# Altium PCB TOP.PcbDoc
Units mil, origin at the board's own origin, x right, y up, seen from the top; angles counter-clockwise.
Board outline 800 x 500 mil, 2 copper layers (Top Layer, Bottom Layer); 6 components, 8 nets, 25 pads, 7 vias.
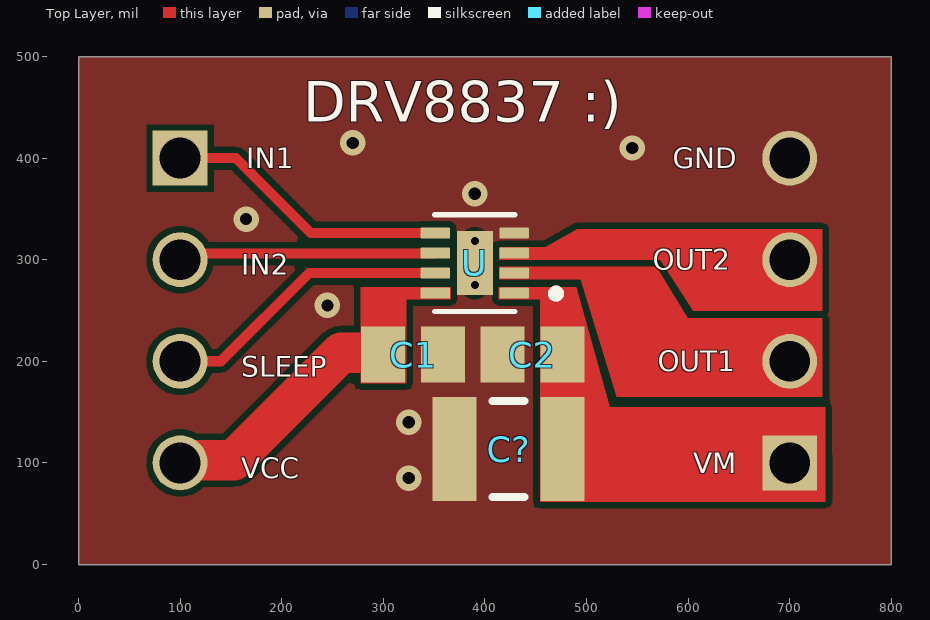
[diagram p0: Top Layer view]
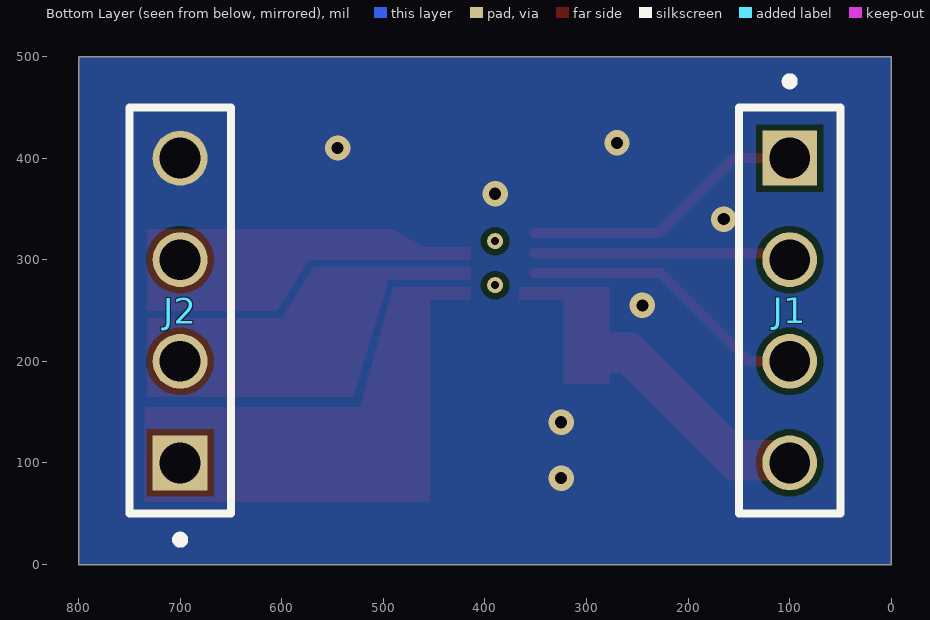
[diagram p1: Bottom Layer view, seen from below]
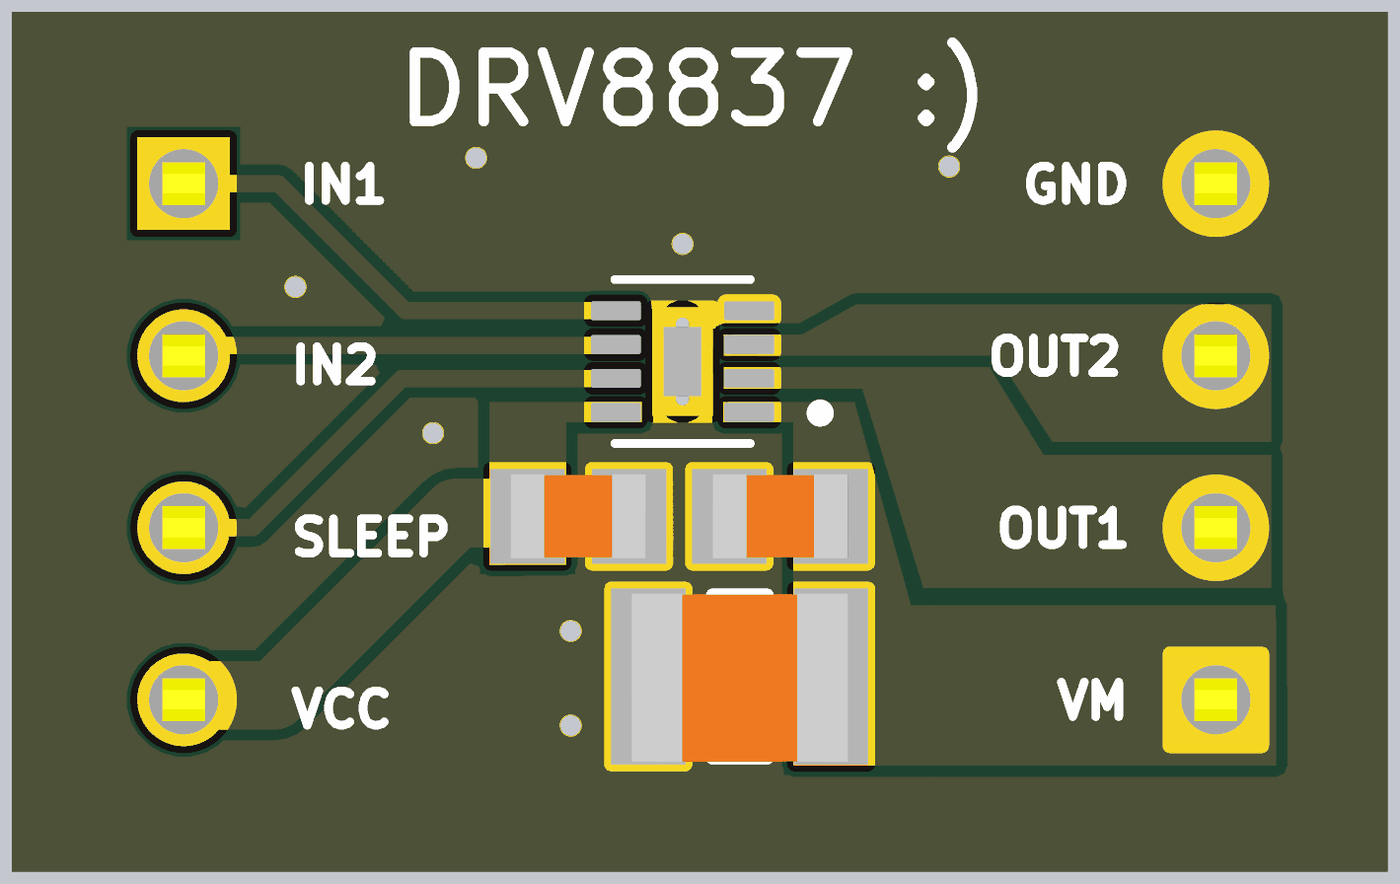
[diagram p2: 3D render of the assembled board from above, using the file's embedded part models]

## Layer stack, top to bottom
Top Solder: solder mask 0.4, Solder Resist, Dk 3.5
Top Layer: signal copper 1.4
Dielectric 1: dielectric 12.6, FR-4, Dk 4.8
Bottom Layer: signal copper 1.4
Bottom Solder: solder mask 0.4, Solder Resist, Dk 3.5

## Board outline
0,0 800,0 800,500 0,500

## Design rules (kind name [scope] priority, off if disabled: settings)
Clearance [All] p1: gap=6 ignorepadtopadclearanceinfootprint=FALSE except(0: Arc-Hole Track-Hole SMDPad-Hole THPad-Hole Via-Hole Fill-Hole Poly-Hole Region-Hole Text-Hole; 5: Arc-SMDPad Arc-THPad Track-SMDPad Track-THPad SMDPad-SMDPad SMDPad-THPad THPad-THPad; 10: Arc-Text Track-Text SMDPad-Text THPad-Text Via-Text Fill-Text Poly-Text Region-Text Text-Text)
PlaneConnect [All] p1: planeconnectstyle=Direct reliefexpansion=20 reliefentries=4 reliefconductorwidth=10 reliefairgap=10
PolygonConnect [All] p1: connectstyle=Direct reliefconductorwidth=10 reliefentries=4 polygonreliefangle="90 Angle" airgapwidth=10
RoutingVias [All] p1: holewidth=28 width=50 viastyle="Through Hole" minholewidth=28 minwidth=50 maxholewidth=28 maxwidth=50
SolderMaskExpansion [All] p1: expansion=4 istentingtop=FALSE
Width [All] p1: maxlimit=100 minlimit=10 preferedwidth=10 bottomlayer_maxwidth=10 minimp=50.000000 maximp=50.000000 favimp=50.000000
29 further rules are at their usual default settings.

## Components (designator, comment, footprint, x,y, rotation, side; value= is the part's Value field where it differs from the comment)
C1 "C0805C104J5RACTU" CAPC0805L 329.34,206.66 r180 top locked
C2 "C0805C104J5RACTU" CAPC0805L 446.7,206.66 r0 top locked
C? "" CAPC1210L 423.25,113.54 r180 top
J1 "TSW-104-07-L-S" TSW-104-07-L-S 100,250 r270 bottom
J2 "TSW-104-07-L-S" TSW-104-07-L-S 700,250 r90 bottom locked
U "DRV8837DSGR" SON50P200X200X80-9N 390,296.65 r180 top locked

## Footprints (in the part's own frame and the unit in brackets; to place one, negate y for a bottom-side part, rotate by r counter-clockwise, add the part's x,y. Pads: shape width x height; smd on the part's side, far side on the other; paste and mask are expansions set on the pad)
CAPC0805L [mm]
  rect 1.1x1.4 smd: 1(-0.75,0) 2(0.75,0)
  body extent -1,-0.63 1,0.63, height 0.6
CAPC1210L [mm]
  rect 1.1x2.6 smd: 1(-1.35,0) 2(1.35,0)
  silkscreen extent -0.4,-1.2 0.4,1.2, body extent -1.6,-1.23 1.6,1.27, height 0.95
SON50P200X200X80-9N [mm]
  rrect25% 0.74x0.28 smd: 1(-0.985,0.75) 2(-0.985,0.25) 3(-0.985,-0.25) 4(-0.985,-0.75) 5(0.985,-0.75) 6(0.985,-0.25) 7(0.985,0.25) 8(0.985,0.75)
  rect 0.9x1.6 smd paste-2: 9(0,0)
  round 0.4 hole 0.2 mask+0: 9_1(0,0.55) 9_2(0,-0.55)
  silkscreen extent -2.13,-1.21 1,1.21
TSW-104-07-L-S [mm] "Samtec Inc. TSW-104-07-L-S"
  rect 1.37x1.37 hole 1.02: 1(-3.81,0)
  round 1.37 hole 1.02: 2(-1.27,0) 3(1.27,0) 4(3.81,0)
  silkscreen extent -5.83,-1.27 5.08,1.27, body extent -5.21,-1.27 5.08,1.27, height 8.38

## Part data
C1 C2: library part CMPL-001-A884-A.2, "0.1µF ±5% 50V Ceramic Capacitor X7R 0805 (2012 Metric)", Capacitance=0.1µF, Manufacturer=KEMET, Operating Temperature="-55°C ~ 125°C", Package=0805, Supplier 1 Part Number=399-1171-1-ND, Temperature Coefficient=X7R, Tolerance=±5%, Voltage Rating=50V, Applications="Bypass, Decoupling", Manufacturer Part Number=C0805C104J5RACTU, Supplier 1=Digikey
C?: library part CMPL-001-A044-A.4, "10µF 50V Ceramic Capacitor X7R 1210 (3225 Metric) 0.126\" L x 0.098\" W (3.20mm x 2.50mm)", Capacitance=10µF, Manufacturer="Murata Electronics North America", Manufacturer Part Number=GRM32ER71H106KA12L, Operating Temperature="-55°C ~ 125°C", Package=1210, Supplier 1 Part Number=490-6544-1-ND, Temperature Coefficient=X7R, Tolerance=±10%, Voltage Rating=50V, Applications="General Purpose", FUTEK Item #=GOD05133, Supplier 1=Digikey
J1 J2: library part CMPL-001-B545-A.2, "CONN HEADER VERT 4POS 2.54MM", Color=Black, Manufacturer="Samtec Inc.", Supplier 1 Part Number=SAM1031-04-ND, Connector Type="Male Pin", Contact Finish=Gold, Contact Finish Thickness="10.0µin (0.25µm)", Contact Type="Male Pin", Manufacturer Part Number=TSW-104-07-L-S, Mounting Type="Through Hole", Number of Positions=4, Number of Positions Loaded=All, Number of Rows=1, Pitch="0.100\" (2.54mm)", RoHS Compliance=Yes, Row Spacing=-, Supplier 1=Digikey, Termination=Solder
U: library part CMP-002-000000-2, "11-V, 1.8-A H-bridge motor driver 8-WSON -40 to 85", Package="WSON-8 Texas Instruments", Arrow_Electronics-Purchase-URL=https://snapeda.com/shop?store=Arrow+Electronics&id=230051, BuyPart=https://www.snapeda.com/parts/DRV8837DSGR/Texas%20Instruments/view-part/230051/?ref=eda, Component Type=Standard, Design Item ID=DRV8837DSGR, Digi-Key_Part_Number=296-34806-1-ND, DigiKey-Purchase-URL=https://snapeda.com/shop?store=DigiKey&id=230051, MF="Texas Instruments", Mouser-Purchase-URL=https://snapeda.com/shop?store=Mouser&id=230051, MP=DRV8837DSGR, Pin Count=9, SnapEDA_Link=https://www.snapeda.com/parts/DRV8837DSGR/Texas%20Instruments/view-part/230051/?ref=snap, Source=DRV8837DSGR.SchLib, Texas_Instruments-Purchase-URL=https://snapeda.com/shop?store=Texas+Instruments&id=230051

## Via types
v1: diameter 25, hole 12, Top Layer to Bottom Layer, tented both sides, 7 vias

## Nets (pads, with @x,y where several pads share a name; then routed paths per layer and width w, separated by ;. In a path a pad name is that pad's centre, name@x,y a point inside that pad or via, vN(x,y) a via of type N, cw(c..) or ccw(c..) an arc to the next point about the centre after c; other vN are vias at no path point)
GND: C1.1 C2.1 C?.2 J2.4 U.4 U.9
  other v1: 325,85 325,140 245,255 165,340 390,365 545,410 270,415
IN1: J1.1 U.5 | length 281.8
  Top Layer w10: J1.1 155,400 228.82,326.18 U.5
IN2: J1.2 U.6 | length 253.9
  Top Layer w10: J1.2 105.98,305.98 350.71,305.98 U.6
OUT1: J2.2 U.2
OUT2: J2.3 U.3
S\L\E\E\P\: J1.3 U.7 | length 287.2
  Top Layer w10: J1.3 140,200 226.81,286.81 U.7
VCC: C1.2 J1.4 U.8 | length 245.8
  Top Layer w40: J1.4 102.67,102.67 152.67,102.67 258.6,208.6 298.15,208.6 299.81,206.94 C1.2
VM: C2.2 C?.1 J2.1 U.1
pads on no net: U.9_1 U.9_2

## Polygon pours and split planes (outlines as drawn)
GND on Top Layer "GND_L01_P001" (solid, remove dead copper, pour order 1): 0,500 800,500 800,0 0,0
GND on Bottom Layer "GND_L02_P000" (solid, remove dead copper, pour order 0): 0,500 800,500 800,0 0,0

## Other copper
Top Layer:
  region net VCC: 366.3,261.27 322.48,261.27 322.48,178.6 277.67,178.42 277.67,273.11 366.3,273.11
  region net VM: 413.7,261.27 454.25,261.27 454.25,61.77 735.13,61.77 734.9,155 522.77,155 490,273.11 413.7,273.11
  region net OUT2: 413.98,300 572.67,300 604.94,250 732.16,250 732.16,300 732.16,330 491.06,330 459.53,312.36 413.98,312.36
  region net OUT1: 413.98,293.31 568.45,293.31 599.77,242.49 732.26,242.49 732.26,165 529.93,165 494.47,280.95 413.98,280.95

## Silkscreen, mask and mechanical layers (free items; w line width, h text height)
Top Overlay:
  text "DRV8837 :)" at 221,436 h40
  text "IN1" at 165,390 h20
  text "GND" at 585,390 h20
  text "OUT2" at 565,290 h20
  text "IN2" at 160,285 h20
  text "OUT1" at 570,190 h20
  text "SLEEP" at 160,185 h20
  text "VM" at 605,90 h20
  text "VCC" at 160,85 h20
Mechanical 1:
  the board outline again, w10

## Dimensions
0,0 to 800,0 on Mechanical 1
0,0 to 0,500 on Mechanical 1